# Altium PCB nir_usb.PcbDoc
Units mm, origin at the board's own origin, x right, y up, seen from the top; angles counter-clockwise.
Board outline 103 x 103.89 mm, 2 copper layers (Top Layer, Bottom Layer); 173 components, 118 nets, 611 pads, 0 vias.
Unrouted connection lines stored in the file: 446.
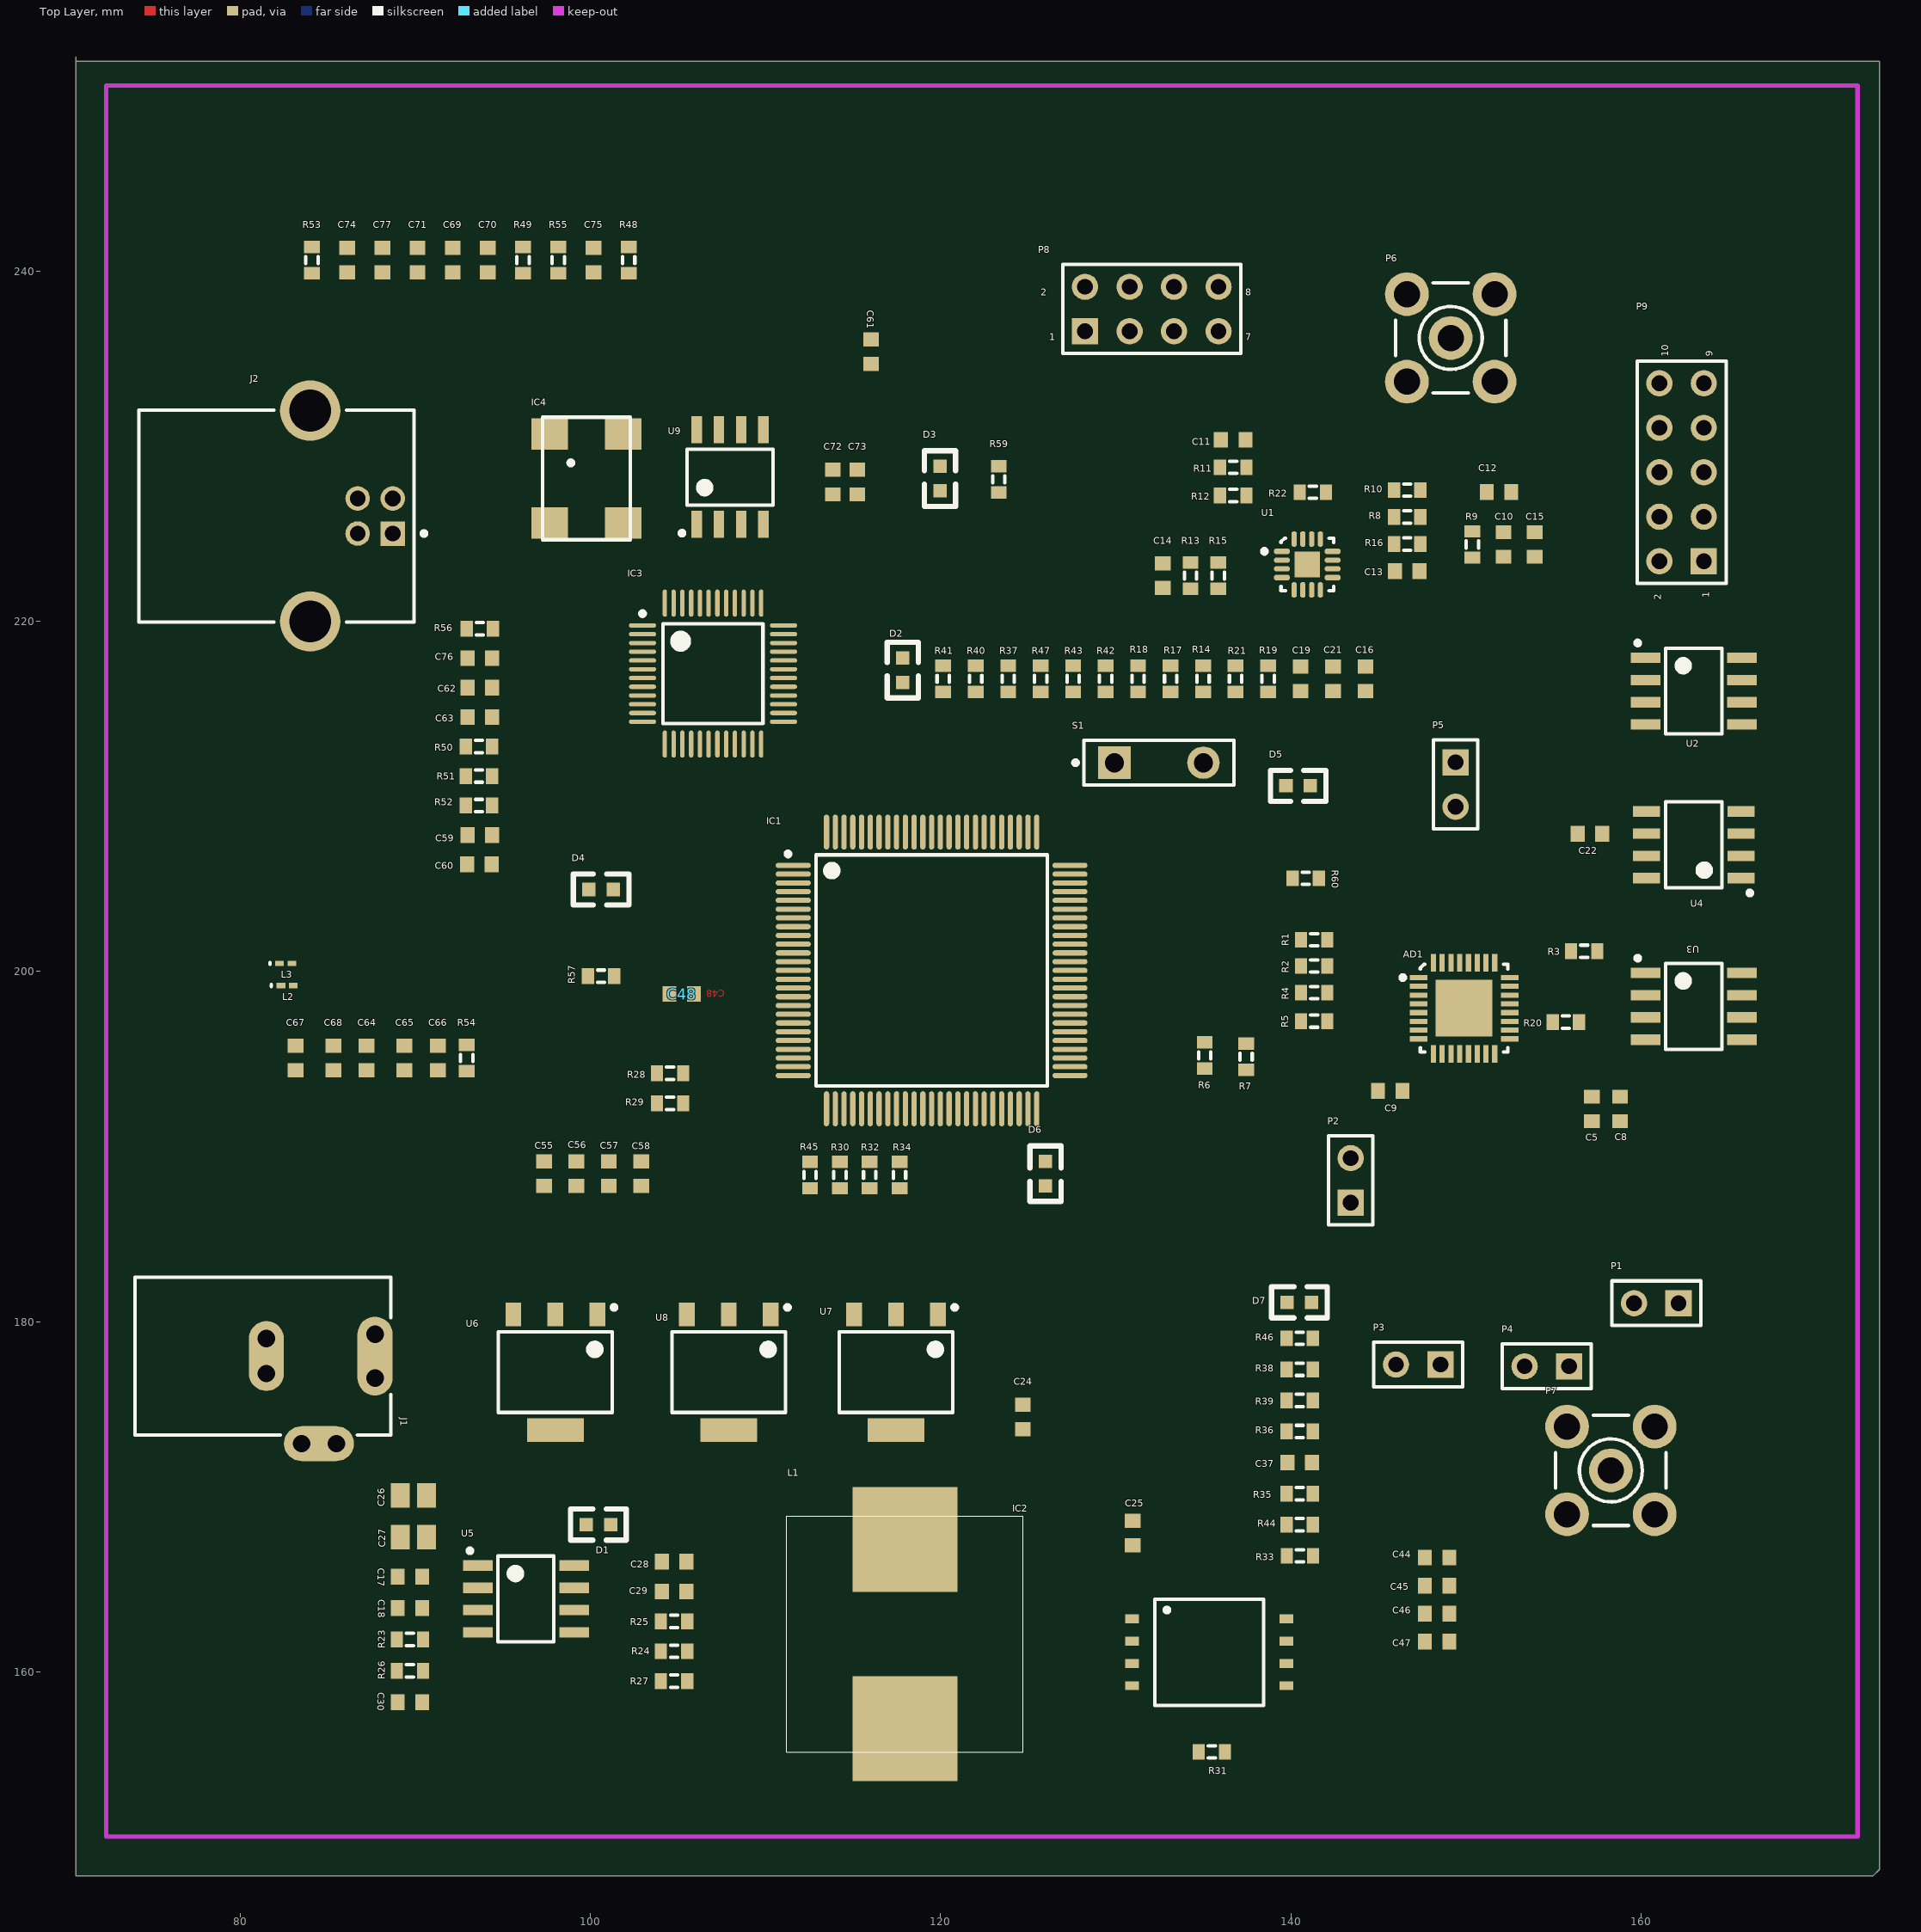
[diagram p0: Top Layer view]
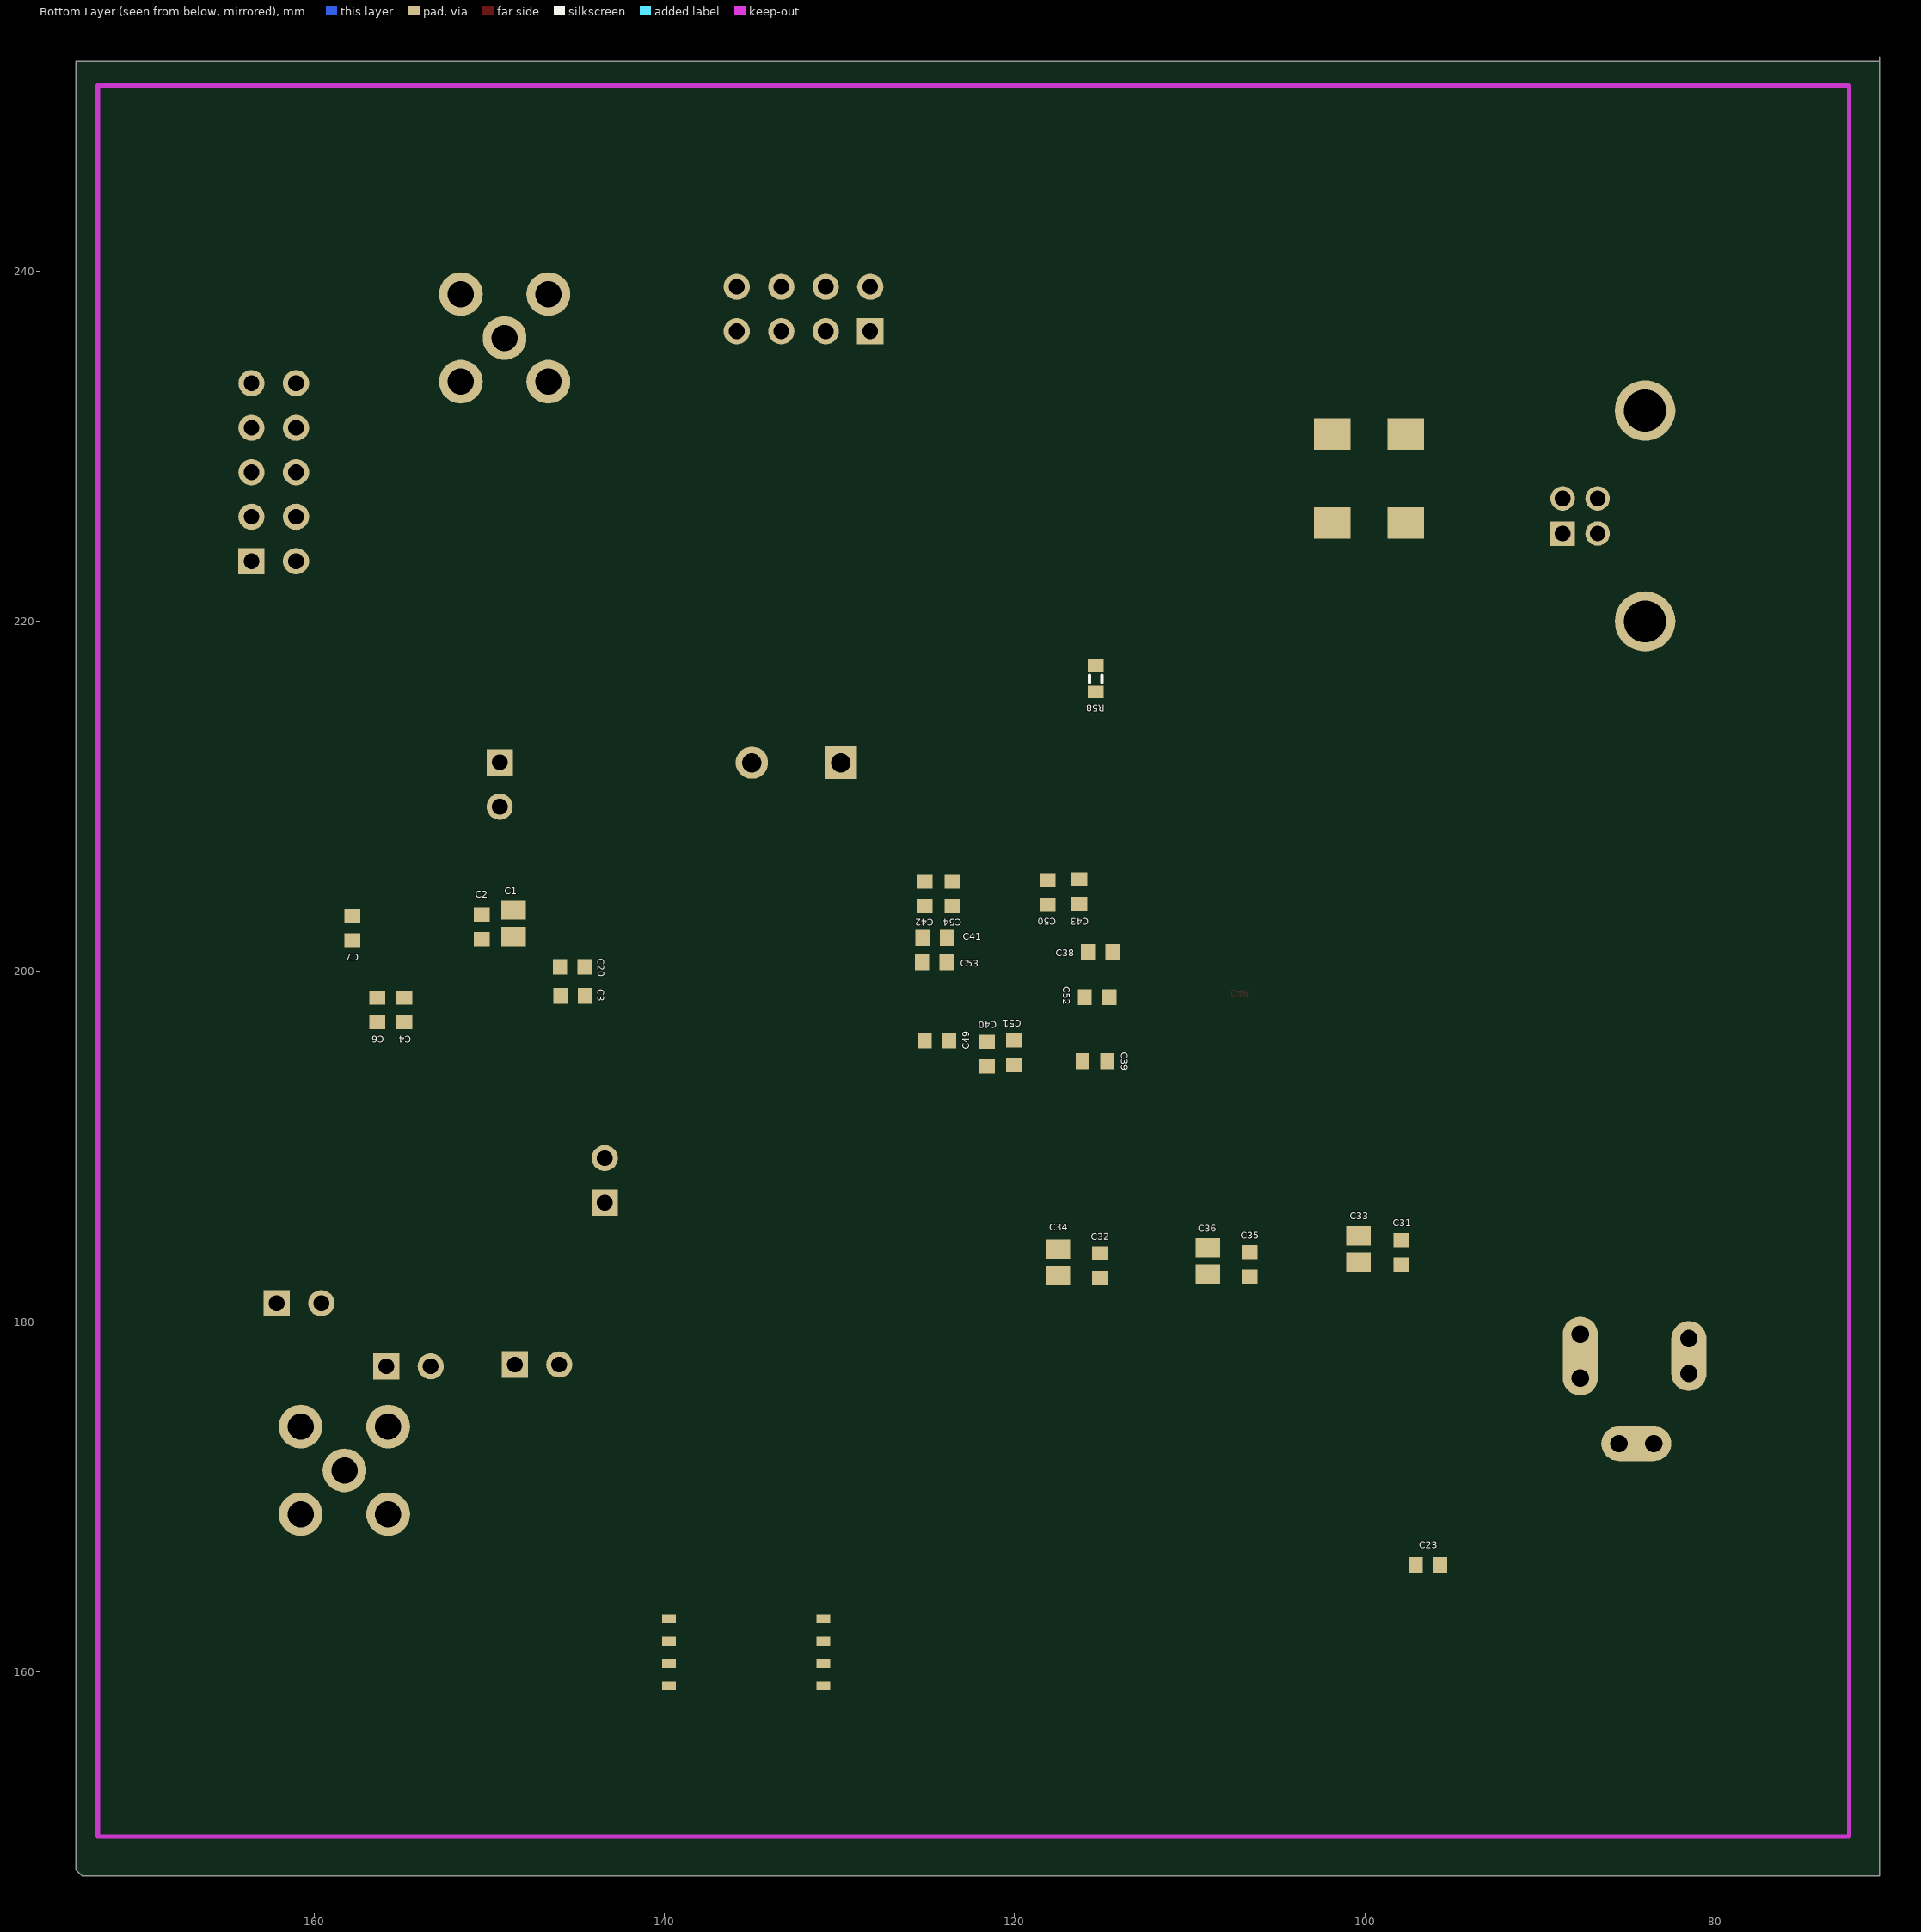
[diagram p1: Bottom Layer view, seen from below]

## Layer stack, top to bottom
Top Layer: signal copper 0.0356
Dielectric: dielectric 0.32, FR-4, Dk 4.8
Bottom Layer: signal copper 0.0356

## Board outline
70.612,251.968 173.609,251.968 173.609,148.717 173.228,148.336 70.612,148.336 70.612,252.222

## Design rules (kind name [scope] priority, off if disabled: settings)
Clearance [All] p1: gap=0.02
ComponentClearance [All] p1: gap=0.025 collisioncheckmode=3 verticalgap=0.025 showdistances=FALSE
PlaneClearance [All] p1: clearance=0.3
PolygonConnect [All] p1: connectstyle=Relief reliefconductorwidth=0.254 reliefentries=4 polygonreliefangle="90 Angle" airgapwidth=0.254
RoutingVias [All] p1: holewidth=0.711 width=1.27 viastyle="Through Hole" minholewidth=0.711 minwidth=1.27 maxholewidth=0.711 maxwidth=1.27
SolderMaskExpansion [All] p1: expansion=0.05
Width [All] p1: maxlimit=0.254 minlimit=0.254 preferedwidth=0.254
26 further rules are at their usual default settings.

## Classes and differential pairs
component class ft232h: C59 C60 C61 C62 C63 C64 C65 C66 C67 C68 C69 C70 C71 C72 C73 C74 C75 C76 C77 IC3 IC4 J2 L2 L3 R48 R49 R50 R51 R52 R53 R54 R55 R56 U9
component class fpga_pwr: C38 C39 C40 C41 C42 C43 C44 C45 C46 C47 C48 C49 C50 C51 C52 C53 C54 C55 C56 C57 C58
component class fpga_misc: C37 D6 D7 IC2 P8 R28 R29 R30 R31 R32 R33 R34 R35 R36 R37 R38 R39 R40 R41 R42 R43 R44 R45 R46 R47 S1
component class fpga_io: D2 D3 D4 D5 IC1 R57 R58 R59 R60
component class digi_pwr: C31 C32 C33 C34 C35 C36 U6 U7 U8
component class digi_5V: C23 C24 C25 C26 C27 C28 C29 C30 D1 J1 L1 R23 R24 R25 R26 R27 U5
component class analog_pwr: C17 C18 C19 C20 C21 C22 R19 R20 R21 R22 U2 U3 U4
component class adc: AD1 C1 C2 C3 C4 C5 C6 C7 C8 C9 P1 P2 P3 P4 R1 R2 R3 R4 R5 R6 R7
component class adc_buffer: C10 C11 C12 C13 C14 C15 C16 P5 P6 P7 R8 R9 R10 R11 R12 R13 R14 R15 R16 R17 R18 U1

## Components (designator, comment, footprint, x,y, rotation, side; value= is the part's Value field where it differs from the comment)
AD1 "AD7961" QFN50P500X500X80-33N 149.885,197.891 r0 top
C1 "Cap Pol3" C0805 148.615,202.743 r90 bottom
C2 "Cap Semi" 1608[0603] 150.419,202.543 r90 bottom
C3 "Cap Semi" 1608[0603] 145.237,198.603 r180 bottom
C4 "Cap Semi" 1608[0603] 154.838,197.79 r90 bottom
C5 "Cap Semi" 1608[0603] 157.175,192.14 r270 top
C6 "Cap Semi" 1608[0603] 156.388,197.79 r270 bottom
C7 "Cap Semi" 1608[0603] 157.81,202.475 r270 bottom
C8 "Cap Semi" 1608[0603] 158.792,192.14 r270 top
C9 "Cap Semi" 1608[0603] 145.669,193.167 r0 top
C10 "Cap Semi" 1608[0603] 152.133,224.376 r270 top
C11 "Cap Semi" 1608[0603] 136.703,230.353 r180 top
C12 "Cap Semi" 1608[0603] 151.879,227.373 r180 top
C13 "Cap Semi" 1608[0603] 146.634,222.86 r180 top
C14 "Cap Semi" 1608[0603] 132.677,222.598 r270 top
C15 "Cap Semi" 1608[0603] 153.911,224.376 r90 top
C16 "Cap Semi" 1608[0603] 144.259,216.705 r90 top
C17 "Cap Semi" 1608[0603] 89.691,165.43 r180 top
C18 "Cap Semi" 1608[0603] 89.691,163.64 r180 top
C19 "Cap Semi" 1608[0603] 140.549,216.705 r90 top
C20 "Cap Semi" 1608[0603] 145.263,200.254 r0 bottom
C21 "Cap Semi" 1608[0603] 142.404,216.705 r90 top
C22 "Cap Semi" 1608[0603] 157.074,207.86 r0 top
C23 "Cap Semi" 1608[0603] 96.393,166.091 r0 bottom
C24 "Cap Semi" 1608[0603] 124.689,174.549 r90 top
C25 "Cap Semi" 1608[0603] 130.962,167.919 r90 top
C26 "Cap Pol3" C0805 89.891,170.078 r0 top
C27 "Cap Pol3" C0805 89.891,167.691 r0 top
C28 "Cap Semi" 1608[0603] 104.775,166.294 r180 top
C29 "Cap Semi" 1608[0603] 104.775,164.586 r0 top
C30 "Cap Semi" 1608[0603] 89.691,158.267 r0 top
C31 "Cap Semi" 1608[0603] 97.917,183.95 r270 bottom
C32 "Cap Semi" 1608[0603] 115.138,183.188 r270 bottom
C33 "Cap Pol3" C0805 100.381,184.15 r90 bottom
C34 "Cap Pol3" C0805 117.526,183.388 r90 bottom
C35 "Cap Semi" 1608[0603] 106.578,183.264 r270 bottom
C36 "Cap Pol3" C0805 108.966,183.464 r90 bottom
C37 "Cap Semi" 1608[0603] 140.496,171.947 r0 top
C38 "Cap Semi" 1608[0603] 115.113,201.117 r180 bottom
C39 "Cap Semi" 1608[0603] 115.418,194.869 r180 bottom
C40 "Cap Semi" 1608[0603] 121.564,195.275 r270 bottom
C41 "Cap Semi" 1608[0603] 124.562,201.905 r0 bottom
C42 "Cap Semi" 1608[0603] 125.146,204.419 r90 bottom
C43 "Cap Semi" 1608[0603] 116.307,204.546 r90 bottom
C44 "Cap Semi" 1608[0603] 148.343,166.521 r0 top
C45 "Cap Semi" 1608[0603] 148.343,164.919 r0 top
C46 "Cap Semi" 1608[0603] 148.343,163.318 r0 top
C47 "Cap Semi" 1608[0603] 148.343,161.716 r0 top
C48 "Cap Semi" 1608[0603] 105.207,198.704 r180 top
C49 "Cap Semi" 1608[0603] 124.435,196.037 r0 bottom
C50 "Cap Semi" 1608[0603] 118.11,204.495 r90 bottom
C51 "Cap Semi" 1608[0603] 120.04,195.351 r270 bottom
C52 "Cap Semi" 1608[0603] 115.291,198.526 r180 bottom
C53 "Cap Semi" 1608[0603] 124.587,200.508 r0 bottom
C54 "Cap Semi" 1608[0603] 123.546,204.419 r90 bottom
C55 "Cap Semi" 1608[0603] 97.348,188.439 r90 top
C56 "Cap Semi" 1608[0603] 99.199,188.439 r90 top
C57 "Cap Semi" 1608[0603] 101.051,188.439 r90 top
C58 "Cap Semi" 1608[0603] 102.902,188.439 r90 top
C59 "Cap Semi" 1608[0603] 93.686,207.785 r0 top
C60 "Cap Semi" 1608[0603] 93.661,206.102 r0 top
C61 "Cap Semi" 1608[0603] 116.027,235.382 r270 top
C62 "Cap Semi" 1608[0603] 93.686,216.198 r0 top
C63 "Cap Semi" 1608[0603] 93.686,214.516 r0 top
C64 "Cap Semi" 1608[0603] 87.224,195.047 r90 top
C65 "Cap Semi" 1608[0603] 89.383,195.047 r90 top
C66 "Cap Semi" 1608[0603] 91.288,195.047 r90 top
C67 "Cap Semi" 1608[0603] 83.16,195.047 r90 top
C68 "Cap Semi" 1608[0603] 85.319,195.047 r90 top
C69 "Cap Semi" 1608[0603] 92.137,240.614 r90 top
C70 "Cap Semi" 1608[0603] 94.147,240.614 r90 top
C71 "Cap Semi" 1608[0603] 90.128,240.614 r90 top
C72 "Cap Semi" 1608[0603] 113.843,227.94 r270 top
C73 "Cap Semi" 1608[0603] 115.24,227.94 r270 top
C74 "Cap Semi" 1608[0603] 86.109,240.614 r90 top
C75 "Cap Semi" 1608[0603] 100.175,240.614 r90 top
C76 "Cap Semi" 1608[0603] 93.686,217.881 r0 top
C77 "Cap Semi" 1608[0603] 88.118,240.614 r90 top
D1 "B340A" LED0603 100.457,168.402 r180 top
D2 "Diode" LED0603 117.831,217.198 r270 top
D3 "Diode" LED0603 119.964,228.143 r270 top
D4 "Diode" LED0603 100.609,204.673 r0 top
D5 "Diode" LED0603 140.411,210.591 r0 top
D6 "LED3" LED0603 125.984,188.443 r90 top
D7 "LED3" LED0603 140.487,181.102 r180 top
IC1 "XC3S200A-VQ100" QFP50P1600X1600X120-100N 119.482,200.05 r0 top
IC2 "M25P80" SO8-WIDE8 135.331,161.112 r0 top
IC3 "FT232HL" LQFP-48_L 107,217 r0 top
IC4 "CO4305-12M" CO4305-12 99.771,228.143 r270 top
J1 "PWR2.5" KLD-0202 74,178.029 r0 top
J2 "Molex 67068" USB-A 84,226 r270 top
L1 "Inductor" "LC Inductor 127" 117.958,162.154 r90 top
L2 "Inductor" 0603 82.683,199.187 r0 top
L3 "Inductor" 0603 82.601,200.457 r0 top
P1 "Header 2" HDR1X2 162.128,181.051 r180 top
P2 "Header 2" HDR1X2 143.408,186.792 r90 top
P3 "Header 2" HDR1X2 148.539,177.546 r180 top
P4 "Header 2" HDR1X2 155.88,177.444 r180 top
P5 "Header 2" HDR1X2 149.403,211.938 r270 top
P6 "SMB" SMB_V-RJ45 149.123,236.169 r0 top
P7 "SMB" SMB_V-RJ45 158.267,171.501 r0 top
P8 "Header 4X2" HDR2X4 128.245,236.55 r0 top
P9 "Header 5X2" HDR2X5 163.576,223.418 r90 top
R1 "Res3" J1-0603 141.326,201.803 r0 top
R2 "Res3" J1-0603 141.326,200.304 r0 top
R3 "0R" J1-0603 156.743,201.143 r180 top
R4 "Res3" J1-0603 141.326,198.78 r0 top
R5 "Res3" J1-0603 141.326,197.155 r0 top
R6 "Res3" J1-0603 135.077,195.199 r270 top
R7 "Res3" J1-0603 137.439,195.123 r90 top
R8 "Res3" J1-0603 146.634,225.941 r0 top
R9 "Res3" J1-0603 150.355,224.376 r90 top
R10 "Res3" J1-0603 146.634,227.482 r180 top
R11 "Res3" J1-0603 136.703,228.778 r180 top
R12 "Res3" J1-0603 136.703,227.178 r180 top
R13 "Res3" J1-0603 134.264,222.598 r90 top
R14 "Res3" J1-0603 134.983,216.705 r90 top
R15 "Res3" J1-0603 135.852,222.598 r270 top
R16 "Res3" J1-0603 146.634,224.401 r0 top
R17 "Res3" J1-0603 133.128,216.705 r90 top
R18 "Res3" J1-0603 131.273,216.705 r90 top
R19 "Res3" J1-0603 138.694,216.705 r270 top
R20 "Res3" J1-0603 155.702,197.104 r0 top
R21 "Res3" J1-0603 136.839,216.705 r90 top
R22 "Res3" J1-0603 141.249,227.355 r180 top
R23 "Res3" J1-0603 89.691,161.849 r180 top
R24 "Res3" J1-0603 104.775,161.169 r0 top
R25 "Res3" J1-0603 104.775,162.877 r180 top
R26 "Res3" J1-0603 89.691,160.058 r0 top
R27 "Res3" J1-0603 104.775,159.461 r180 top
R28 "Res3" J1-0603 104.546,194.177 r180 top
R29 "Res3" J1-0603 104.546,192.456 r180 top
R30 "Res3" J1-0603 114.241,188.366 r90 top
R31 "Res3" J1-0603 135.484,155.423 r0 top
R32 "Res3" J1-0603 115.947,188.366 r90 top
R33 "Res3" J1-0603 140.513,166.624 r180 top
R34 "Res3" J1-0603 117.653,188.366 r270 top
R35 "Res3" J1-0603 140.496,170.173 r0 top
R36 "Res3" J1-0603 140.496,173.721 r180 top
R37 "Res3" J1-0603 123.852,216.705 r90 top
R38 "Res3" J1-0603 140.496,177.27 r0 top
R39 "Res3" J1-0603 140.496,175.495 r0 top
R40 "Res3" J1-0603 121.997,216.705 r270 top
R41 "Res3" J1-0603 120.142,216.705 r270 top
R42 "Res3" J1-0603 129.418,216.705 r270 top
R43 "Res3" J1-0603 127.563,216.705 r270 top
R44 "Res3" J1-0603 140.496,168.398 r0 top
R45 "Res3" J1-0603 112.535,188.366 r90 top
R46 "Res3" J1-0603 140.496,179.044 r180 top
R47 "Res3" J1-0603 125.708,216.705 r270 top
R48 "Res3" J1-0603 102.184,240.614 r90 top
R49 "Res3" J1-0603 96.156,240.614 r90 top
R50 "Res3" J1-0603 93.636,212.833 r180 top
R51 "Res3" J1-0603 93.636,211.15 r180 top
R52 "Res3" J1-0603 93.636,209.467 r180 top
R53 "Res3" J1-0603 84.099,240.614 r270 top
R54 "Res3" J1-0603 92.939,195.047 r90 top
R55 "Res3" J1-0603 98.165,240.614 r90 top
R56 "Res3" J1-0603 93.686,219.564 r180 top
R57 "Res3" J1-0603 100.609,199.72 r180 top
R58 "Res3" J1-0603 115.367,216.705 r270 bottom
R59 "Res3" J1-0603 123.317,228.092 r270 top
R60 "Res3" J1-0603 140.843,205.308 r0 top
S1 "SW-PB" SPST-2 132.461,211.912 r0 top
U1 "ADA9432-1" QFN50P300X300X100VQ-17N 140.932,223.233 r0 top
U2 "MIC5209BM" SOIC127P600X175-8N#1 163,216 r0 top
U3 "MIC5209BM" SOIC127P600X175-8N#1 163,198 r0 top
U4 "REF5040" SOIC127P600X175-8N#2 163,207.225 r180 top
U5 "TPS54331" SOIC127P600X175-8N#1 96.317,164.16 r0 top
U6 "AMS1117" SOT-223 98,177.114 r270 top
U7 "AMS1117" SOT-223 117.45,177.114 r270 top
U8 "AMS1117" SOT-223 107.899,177.114 r270 top
U9 "93C46" SOIC127P600X175-8N#2 107.975,228.219 r90 top

## Footprints (in the part's own frame and the unit in brackets; to place one, negate y for a bottom-side part, rotate by r counter-clockwise, add the part's x,y. Pads: shape width x height; smd on the part's side, far side on the other; paste and mask are expansions set on the pad)
0603 [mm] "Chip Inductor, Body 0.6x0.3mm, IPC High Density"
  rect 0.5x0.3 smd: 1(-0.35,0) 2(0.35,0)
  silkscreen extent -0.9,-0.05 -0.9,0.05, body extent -0.33,-0.18 0.33,0.18, height 0.55
1608[0603] [mm] "Chip Capacitor, Body 1.6x0.8mm, IPC High Density"
  rect 0.8x0.9 smd: 1(-0.7,0) 2(0.7,0)
  body extent -0.87,-0.48 0.87,0.48, height 1.3
C0805 [mm] "Chip Capacitor, Body 2.0x1.3mm, IPC High Density"
  rect 1.1x1.4 smd: 1(-0.75,0) 2(0.75,0)
  body extent -1.1,-0.72 1.1,0.72, height 1.4
CO4305-12 [mm]
  rect 1.8x2.1 all layers, no hole: 1(-2.54,-2.1) 2(2.54,-2.1) 3(2.54,2.1) 4(-2.54,2.1)
  silkscreen extent -3.5,-2.5 3.5,2.5
HDR1X2 [mm] "Connector; Header; 2 Position"
  rect 1.5x1.5 hole 0.9: 1(0,0)
  round 1.5 hole 0.9: 2(2.54,0)
  silkscreen extent -1.27,-1.27 3.81,1.27
HDR2X4 [mm] "Connector; Header; 4x2 Position"
  rect 1.5x1.5 hole 0.9: 1(0,0)
  round 1.5 hole 0.9: 2(0,2.54) 3(2.54,0) 4(2.54,2.54) 5(5.08,0) 6(5.08,2.54) 7(7.62,0) 8(7.62,2.54)
  silkscreen extent -1.27,-1.27 8.89,3.81
HDR2X5 [mm] "Connector; Header; 5x2 Position"
  rect 1.5x1.5 hole 0.9: 1(0,0)
  round 1.5 hole 0.9: 2(0,2.54) 3(2.54,0) 4(2.54,2.54) 5(5.08,0) 6(5.08,2.54) 7(7.62,0) 8(7.62,2.54) 9(10.16,0) 10(10.16,2.54)
  silkscreen extent -1.27,-1.27 11.43,3.81
J1-0603 [mm] "Chip Resistor, Body 1.6x0.8mm, IPC High Density"
  rect 0.7x0.9 smd: 1(-0.75,0) 2(0.75,0)
  silkscreen extent -0.2,-0.35 0.2,0.35, body extent -0.85,-0.48 0.85,0.48, height 0.9
KLD-0202 [mm] "DC Power Jack, 2.5mm, KLD Series, PCB Mount"
  oval 2x4.5 all layers, no hole: 1(13.7,0)
  round 1.5 hole 1: 1A(13.7,-1.25) 1B(13.7,1.25) 2A(7.5,-1) 2B(7.5,1) 3A(9.5,-5) 3B(11.5,-5)
  oval 2x4 all layers, no hole: 2(7.5,0)
  oval 4x2 all layers, no hole: 3(10.5,-5)
  silkscreen extent 0,-4.5 14.6,4.5
"LC Inductor 127" [mm]
  rect 6x6 smd: 1(-5.4,0) 2(5.4,0)
  silkscreen extent -6.75,-6.75 6.75,6.75
LED0603 [mil]
  rect 30x30 smd: 1(-27.4,0) 2(27.6,0)
  silkscreen extent -62,-35 63,35
LQFP-48_L [mm] "48-Pin Thin Quad Flat Pack 0.5 mm Pitch, IPC High Density"
  oval 1.55x0.25 smd: 1(-4.025,2.75) 2(-4.025,2.25) 3(-4.025,1.75) 4(-4.025,1.25) 5(-4.025,0.75) 6(-4.025,0.25) 7(-4.025,-0.25) 8(-4.025,-0.75) 9(-4.025,-1.25) 10(-4.025,-1.75) 11(-4.025,-2.25) 12(-4.025,-2.75) 25(4.025,-2.75) 26(4.025,-2.25) 27(4.025,-1.75) 28(4.025,-1.25) 29(4.025,-0.75) 30(4.025,-0.25) 31(4.025,0.25) 32(4.025,0.75) 33(4.025,1.25) 34(4.025,1.75) 35(4.025,2.25) 36(4.025,2.75)
  oval 0.25x1.55 smd: 13(-2.75,-4.025) 14(-2.25,-4.025) 15(-1.75,-4.025) 16(-1.25,-4.025) 17(-0.75,-4.025) 18(-0.25,-4.025) 19(0.25,-4.025) 20(0.75,-4.025) 21(1.25,-4.025) 22(1.75,-4.025) 23(2.25,-4.025) 24(2.75,-4.025) 37(2.75,4.025) 38(2.25,4.025) 39(1.75,4.025) 40(1.25,4.025) 41(0.75,4.025) 42(0.25,4.025) 43(-0.25,4.025) 44(-0.75,4.025) 45(-1.25,4.025) 46(-1.75,4.025) 47(-2.25,4.025) 48(-2.75,4.025)
  silkscreen extent -4.15,-2.85 2.85,3.55, body extent -3.5,-3.5 3.5,3.5, height 1.6
QFN50P300X300X100VQ-17N [mm]
  oct 0.9x0.3 smd mask+0.05: 1(-1.45,0.75) 2(-1.45,0.25) 3(-1.45,-0.25) 4(-1.45,-0.75) 9(1.45,-0.75) 10(1.45,-0.25) 11(1.45,0.25)
  oct 0.3x0.9 smd mask+0.05: 5(-0.75,-1.45) 6(-0.25,-1.45) 7(0.25,-1.45) 8(0.75,-1.45) 13(0.75,1.45) 14(0.25,1.45) 15(-0.25,1.45) 16(-0.75,1.45)
  oct 0.9x0.3 smd paste+0 mask+0.05: 12(1.45,0.75)
  rect 1.45x1.45 smd: 17(0,0)
  silkscreen extent -2.57,-1.5 1.5,1.5
QFN50P500X500X80-33N [mm]
  rect 1x0.3 smd mask+0.05: 1(-2.6,1.75) 2(-2.6,1.25) 3(-2.6,0.75) 4(-2.6,0.25) 5(-2.6,-0.25) 6(-2.6,-0.75) 7(-2.6,-1.25) 8(-2.6,-1.75) 17(2.6,-1.75) 18(2.6,-1.25) 19(2.6,-0.75) 20(2.6,-0.25) 21(2.6,0.25) 22(2.6,0.75) 23(2.6,1.25) 24(2.6,1.75)
  rect 0.3x1 smd mask+0.05: 9(-1.75,-2.6) 10(-1.25,-2.6) 11(-0.75,-2.6) 12(-0.25,-2.6) 13(0.25,-2.6) 14(0.75,-2.6) 15(1.25,-2.6) 16(1.75,-2.6) 25(1.75,2.6) 26(1.25,2.6) 27(0.75,2.6) 28(0.25,2.6) 29(-0.25,2.6) 30(-0.75,2.6) 31(-1.25,2.6) 32(-1.75,2.6)
  rect 3.25x3.25 smd mask+0.05: 33(0,0)
  silkscreen extent -3.62,-2.5 2.5,2.5
QFP50P1600X1600X120-100N [mm]
  oval 2x0.3 smd: 1(-7.9,6) 2(-7.9,5.5) 3(-7.9,5) 4(-7.9,4.5) 5(-7.9,4) 6(-7.9,3.5) 7(-7.9,3) 8(-7.9,2.5) 9(-7.9,2) 10(-7.9,1.5) 11(-7.9,1) 12(-7.9,0.5) 13(-7.9,0) 14(-7.9,-0.5) 15(-7.9,-1) 16(-7.9,-1.5) 17(-7.9,-2) 18(-7.9,-2.5) 19(-7.9,-3) 20(-7.9,-3.5) 21(-7.9,-4) 22(-7.9,-4.5) 23(-7.9,-5) 24(-7.9,-5.5) 25(-7.9,-6) 51(7.9,-6) 52(7.9,-5.5) 53(7.9,-5) 54(7.9,-4.5) 55(7.9,-4) 56(7.9,-3.5) 57(7.9,-3) 58(7.9,-2.5) 59(7.9,-2) 60(7.9,-1.5) 61(7.9,-1) 62(7.9,-0.5) 63(7.9,0) 64(7.9,0.5) 65(7.9,1) 66(7.9,1.5) 67(7.9,2) 68(7.9,2.5) 69(7.9,3) 70(7.9,3.5) 71(7.9,4) 72(7.9,4.5) 73(7.9,5) 74(7.9,5.5) 75(7.9,6)
  oval 0.3x2 smd: 26(-6,-7.9) 27(-5.5,-7.9) 28(-5,-7.9) 29(-4.5,-7.9) 30(-4,-7.9) 31(-3.5,-7.9) 32(-3,-7.9) 33(-2.5,-7.9) 34(-2,-7.9) 35(-1.5,-7.9) 36(-1,-7.9) 37(-0.5,-7.9) 38(0,-7.9) 39(0.5,-7.9) 40(1,-7.9) 41(1.5,-7.9) 42(2,-7.9) 43(2.5,-7.9) 44(3,-7.9) 45(3.5,-7.9) 46(4,-7.9) 47(4.5,-7.9) 48(5,-7.9) 49(5.5,-7.9) 50(6,-7.9) 76(6,7.9) 77(5.5,7.9) 78(5,7.9) 79(4.5,7.9) 80(4,7.9) 81(3.5,7.9) 82(3,7.9) 83(2.5,7.9) 84(2,7.9) 85(1.5,7.9) 86(1,7.9) 87(0.5,7.9) 88(0,7.9) 89(-0.5,7.9) 90(-1,7.9) 91(-1.5,7.9) 92(-2,7.9) 93(-2.5,7.9) 94(-3,7.9) 95(-3.5,7.9) 96(-4,7.9) 97(-4.5,7.9) 98(-5,7.9) 99(-5.5,7.9) 100(-6,7.9)
  silkscreen extent -8.32,-6.6 6.6,6.77
SMB_V-RJ45 [mm] "Connector; SMB Straight"
  round 2.5 hole 1.5: 1(0,0) 2(-2.5,-2.5) 2(-2.5,2.5) 2(2.5,-2.5) 2(2.5,2.5)
  silkscreen extent -3.15,-3.15 3.15,3.15
SO8-WIDE8 [mm]
  rect 0.8x0.51 all layers, no hole: 1(-4.405,1.905) 2(-4.405,0.635) 3(-4.405,-0.635) 4(-4.405,-1.905) 5(4.405,-1.905) 6(4.405,-0.635) 7(4.405,0.635) 8(4.405,1.905)
  silkscreen extent -3.11,-3.02 3.11,3.02
SOIC127P600X175-8N#1 [mm]
  rect 1.7x0.6 smd: 1(-2.75,1.905) 2(-2.75,0.635) 3(-2.75,-0.635) 4(-2.75,-1.905) 5(2.75,-1.905) 6(2.75,-0.635) 7(2.75,0.635) 8(2.75,1.905)
  silkscreen extent -3.32,-2.45 1.6,2.87
SOIC127P600X175-8N#2 [mm]
  rect 1.55x0.6 smd: 1(-2.7,1.905) 2(-2.7,0.635) 3(-2.7,-0.635) 4(-2.7,-1.905) 5(2.7,-1.905) 6(2.7,-0.635) 7(2.7,0.635) 8(2.7,1.905)
  silkscreen extent -3.33,-2.45 1.6,2.87
SOT-223 [mm]
  rect 1.35x0.9 smd: 1(-3.295,2.4) 2(-3.295,0) 3(-3.295,-2.4)
  rect 1.35x3.25 smd: 4(3.305,0)
  silkscreen extent -3.82,-3.25 2.3,3.48
SPST-2 [mm] "Switch; 2 Leads"
  rect 1.85x1.85 hole 1.1: 1(-2.54,0)
  round 1.85 hole 1.1: 2(2.54,0)
  silkscreen extent -4.89,-1.27 4.28,1.27
USB-A [mm]
  rect 1.4x1.4 / inner round 1.4 / far side rect 1.4x1.4 hole 0.9: 1(1,4.71)
  round 1.4 hole 0.9: 2(-1,4.71) 3(-1,2.71) 4(1,2.71)
  round 3.45 hole 2.4: 5(-6.02,0) 6(6.02,0)
  silkscreen extent -6.05,-9.78 6.05,6.62

## Part data
C1 C26 C27 C33 C34 C36: "Polarized Capacitor (Surface Mount)"
C2 C3 C4 C5 C6 C7 C8 C9 C10 C11 C12 C13 C14 C15 C16 C17 C18 C19 C20 C21 C22 C23 C24 C25 C28 C29 C30 C31 C32 C35 C37 C38 C39 C40 C41 C42 C43 C44 C45 C46 C47 C48 C49 C50 C51 C52 C53 C54 C55 C56 C57 C58 C59 C60 C61 C62 C63 C64 C65 C66 C67 C68 C69 C70 C71 C72 C73 C74 C75 C76 C77: "Capacitor (Semiconductor SIM Model)"
D1: library part "D Schottky", "Schottky Diode"
D2 D3 D4 D5: "Default Diode"
D6 D7: "Typical BLUE SiC LED"
J1: "Low Voltage Power Supply Connector"
P1 P2 P3 P4 P5: "Header, 2-Pin"
P6 P7: "SMB Straight Connector"
P8: "Header, 4-Pin, Dual row"
P9: "Header, 5-Pin, Dual row"
R1 R2 R4 R5 R6 R7 R8 R9 R10 R11 R12 R13 R14 R15 R16 R17 R18 R19 R20 R21 R22 R23 R24 R25 R26 R27 R28 R29 R30 R31 R32 R33 R34 R35 R36 R37 R38 R39 R40 R41 R42 R43 R44 R45 R46 R47 R48 R49 R50 R51 R52 R53 R54 R55 R56 R57 R58 R59 R60: "Resistor"
R3: library part Res3, "Resistor"
S1: "Switch"

## Nets (pads, with @x,y where several pads share a name; then routed paths per layer and width w, separated by ;. In a path a pad name is that pad's centre, name@x,y a point inside that pad or via, vN(x,y) a via of type N, cw(c..) or ccw(c..) an arc to the next point about the centre after c; other vN are vias at no path point)
AD_TRI: P9.10
ADC_IN+: AD1.23 C12.1 C15.2 R16.2
ADC_IN-: AD1.22 C10.1 C12.2 R9.2
CCLK: IC1.53 R39.1
CLK+: AD1.17 IC1.56 P1.1 R6.2
CLK-: AD1.16 IC1.57 P1.2 R6.1
CLK_S: P9.9
CLKOUT: IC1.90 IC3.29
CONV+: AD1.9 IC1.64 P2.1 R7.1
CONV-: AD1.8 IC1.65 P2.2 R7.2
CSO_B: IC1.27 R34.1
D0: D4.2 IC1.20 IC3.13
D1: IC1.19 IC3.14
D2: IC1.16 IC3.15
D3: IC1.15 IC3.16
D4: IC1.13 IC3.17
D5: IC1.12 IC3.18
D6: IC1.10 IC3.19
D7: IC1.9 IC3.20
D+: AD1.11 IC1.61 P3.1
D-: AD1.10 IC1.62 P3.2
DCO+: AD1.15 IC1.59 P4.1
DCO-: AD1.14 IC1.60 P4.2
DIFF_IN+: P5.1 P6.1 P9.1 R10.1
DIFF_IN-: P5.2 P7.1 P9.2 R14.1
DONE: IC1.54 R38.1 R46.2
EECLK: IC3.44 R55.1 U9.2
EECS: IC3.45 R54.1 U9.1
EEDATA: IC3.43 R48.2 U9.3
EN0: IC1.73 R1.1 R60.1
EN1: IC1.72 R2.1
EN2: IC1.71 R4.1
EN3: IC1.70 R5.1
FT_RET: IC1.98 IC3.34
GND: AD1.13 AD1.24 AD1.26 AD1.27 AD1.28 C1.2 C2.2 C3.2 C4.2 C5.2 C6.1 C7.1 C8.2 C9.1 C10.2 C11.2 C13.1 C15.1 C16.1 C17.2 C18.2 C19.1 C20.1 C21.1 C22.1 C24.1 C25.1 C26.2 C27.2 C28.1 C30.1 C31.1 C32.1 C33.2 C34.2 C35.1 C36.2 C37.2 C38.1 C39.1 C40.1 C41.1 C42.1 C43.1 C44.1 C45.1 C46.1 C47.1 C48.1 C49.1 C50.1 C51.1 C52.1 C53.1 C54.1 C55.1 C56.1 C57.1 C58.1 C59.1 C60.1 C61.1 C62.1 C63.1 C64.1 C65.1 C66.1 C67.1 C68.1 C69.1 C70.1 C71.1 C72.1 C73.1 C74.1 C75.1 C76.1 C77.1 D1.1 D2.2 D5.2 D7.2 IC1.8 IC1.14 IC1.18 IC1.42 IC1.47 IC1.58 IC1.63 IC1.69 IC1.74 IC1.80 IC1.87 IC1.91 IC1.95 IC2.4 IC3.4 IC3.9 IC3.10 IC3.11 IC3.22 IC3.23 IC3.35 IC3.36 IC3.41 IC3.42 IC3.47 IC3.48 IC4.2 J1.2 J1.2A J1.2B J2.4 P6.2 P7.2 P8.1 P8.4 P8.7 P9.3 P9.4 P9.5 P9.8 R3.1 R8.2 R17.1 R18.1 R21.2 R22.2 R25.1 R26.1 R27.1 R28.2 R29.2 R47.1 R51.2 R53.2 S1.2 U1.13 U1.14 U1.15 U1.16 U2.5 U2.6 U2.7 U2.8 U3.5 U3.6 U3.7 U3.8 U4.4 U5.7 U6.1 U7.1 U8.1 U9.5
INIT_B: D6.2 IC1.48
M0: IC1.25 R30.1
M1: IC1.23 R28.1
M2: IC1.24 R29.1
MISO: IC1.51 R44.1
MOSI: IC1.46 R35.1
NetAD1_4: AD1.4 R1.2
NetAD1_5: AD1.5 R2.2
NetAD1_6: AD1.6 R4.2
NetAD1_7: AD1.7 R5.2
NetC11_1: C11.1 R8.1 R10.2 R11.1
NetC14_1: C14.1 R18.2
NetC14_2: C14.2 R13.1 R14.2 R17.2
NetC23_1: C23.1 U5.1
NetC23_2: C23.2 D1.2 L1.1 U5.8
NetC28_2: C28.2 C29.1 U5.6
NetC29_2: C29.2 R25.2
NetC30_2: C30.2 U5.4
NetC59_2: C59.2 C60.2 IC3.8 L2.2
NetC62_2: C62.2 C63.2 IC3.3 L3.2
NetC72_2: C72.2 IC3.38
NetC73_2: C73.2 IC3.37
NetC74_2: C74.2 J2.5 J2.6 R53.1
NetC76_2: C76.2 IC3.1 R56.1
NetD2_1: D2.1 R58.2
NetD3_1: D3.1 R59.1
NetD4_1: D4.1 R57.2
NetD5_1: D5.1 R60.2
NetD6_1: D6.1 R45.1
NetD7_1: D7.1 R46.1
NetIC1_1: IC1.1 R40.2
NetIC1_2: IC1.2 R41.2
NetIC1_75: IC1.75 R42.2
NetIC1_76: IC1.76 R43.2
NetIC1_99: IC1.99 R47.2
NetIC2_1: IC2.1 R32.1 R34.2
NetIC2_2: IC2.2 R44.2
NetIC2_3: IC2.3 R31.1
NetIC2_5: IC2.5 R35.2
NetIC2_6: IC2.6 R36.1 R39.2
NetIC2_7: IC2.7 R33.1
NetIC3_5: IC3.5 R51.1
NetIC3_6: IC3.6 R50.1
NetIC3_7: IC3.7 R52.1
NetIC4_3: IC4.3 R56.2
NetJ1_3: J1.3 J1.3A J1.3B
NetJ2_2: J2.2 R50.2
NetJ2_3: J2.3 R52.2
NetR9_1: R9.1 U1.11
NetR11_2: R11.2 R12.2 U1.2
NetR12_1: R12.1 U1.1
NetR13_2: R13.2 R15.1 U1.3
NetR15_2: R15.2 U1.4
NetR16_1: R16.1 U1.10
NetR19_2: R19.2 R21.1 U2.4
NetR20_2: R20.2 R22.1 U3.4
NetR23_1: R23.1 R26.2 U5.3
NetR24_1: R24.1 R27.2 U5.5
NetR48_1: R48.1 R49.1 U9.4
OE: IC1.31 IC3.30
PROG_B: IC1.100 R37.1 S1.1
PWRSAV#: IC1.94 IC3.31 R58.1
RD#: IC1.4 IC3.26
REFIN: AD1.3 R3.2
RET_S: P9.7
RXF#: IC1.6 IC3.21
SIWU#: D3.2 IC1.29 IC3.28
TCK: P8.5 R43.1
TDI: P8.8 R41.1
TDO: P8.6 R42.1
TMS: P8.3 R40.1
TXE#: IC1.5 IC3.25
VCC1V2: C36.1 C51.2 C52.2 C53.2 C54.2 C55.2 C56.2 C57.2 C58.2 IC1.17 IC1.38 IC1.66 IC1.81 U8.2 U8.4
VCC1V8: AD1.2 AD1.18 AD1.25 C3.1 C5.1 C8.1 C34.1 U7.2 U7.4
VCC3V3: C33.1 C37.1 C38.2 C39.2 C40.2 C41.2 C42.2 C43.2 C44.2 C45.2 C46.2 C47.2 C48.2 C49.2 C50.2 C64.2 C65.2 C66.2 C67.2 C68.2 C69.2 C70.2 C71.2 C75.2 C77.2 IC1.11 IC1.22 IC1.26 IC1.45 IC1.55 IC1.67 IC1.79 IC1.92 IC1.96 IC2.8 IC3.12 IC3.24 IC3.39 IC3.40 IC3.46 IC4.1 IC4.4 L2.1 L3.1 R30.2 R31.2 R32.2 R33.2 R36.2 R37.2 R38.2 R45.2 R49.2 R54.2 R55.2 R57.1 R59.2 U6.2 U6.4
VCC5: C24.2 C25.2 C31.2 C32.2 C35.2 C61.2 J2.1 L1.2 R24.2 U6.3 U7.3 U8.3 U9.6 U9.8
VCC5A: AD1.1 AD1.19 AD1.20 C4.1 C6.2 C7.2 C20.2 R20.1 U3.3
VCC7A: C16.2 C19.2 C21.2 R19.1 U1.5 U1.6 U1.7 U1.8 U1.12 U2.3 U3.1 U3.2 U4.2
VCC12: C17.1 C18.1 C26.1 C27.1 J1.1 J1.1A J1.1B P8.2 R23.2 U2.1 U2.2 U5.2
VCM: AD1.21 C13.2 U1.9
VIO: AD1.12 C9.2
VREF4V: AD1.29 AD1.30 AD1.31 AD1.32 C1.1 C2.1 C22.2 P9.6 U4.6
WR#: IC1.3 IC3.27
pads on no net: AD1.33 IC1.7 IC1.21 IC1.28 IC1.30 IC1.32 IC1.33 IC1.34 IC1.35 IC1.36 IC1.37 IC1.39 IC1.40 IC1.41 IC1.43 IC1.44 IC1.49 IC1.50 IC1.52 IC1.68 IC1.77 IC1.78 IC1.82 IC1.83 IC1.84 IC1.85 IC1.86 IC1.88 IC1.89 IC1.93 IC1.97 IC3.2 IC3.32 IC3.33 U1.17 U4.1 U4.3 U4.5 U4.7 U4.8 U9.7

## Keep-outs
Keep-Out Layer:
  lines w0.254: 72.352,150.584 72.352,250.584 172.352,250.584 172.352,150.584 72.352,150.584

## Text inside footprints (layer, text, board x,y; h text height)
AD1: Mechanical 15 "1" at 150.335,197.727 h0.75 r90
IC1: Mechanical 15 "1" at 119.932,199.886 h0.75 r90
J2: Mechanical 15 "1" at 88.546,224.55 h0.75
P8: Top Overlay "2" at 125.705,238.582 h0.4; Top Overlay "1" at 126.213,236.042 h0.4; Top Overlay "7" at 137.389,236.042 h0.4; Top Overlay "8" at 137.389,238.582 h0.4
P9: Top Overlay "10" at 161.544,235.102 h0.4 r90; Top Overlay "9" at 164.084,235.102 h0.4 r90; Top Overlay "1" at 163.881,221.336 h0.4 r90; Top Overlay "2" at 161.138,221.209 h0.4 r90
U1: Mechanical 15 "1" at 141.382,223.069 h0.4 r90
U2: Mechanical 15 "1" at 163.45,215.836 h0.75 r90
U3: Mechanical 15 "1" at 163.45,197.836 h0.75 r90
U4: Mechanical 15 "1" at 162.55,207.389 h0.75 r270
U5: Mechanical 15 "1" at 96.767,163.996 h0.75 r90
U6: Mechanical 15 "1" at 97.836,176.659 h0.75
U7: Mechanical 15 "1" at 117.285,176.659 h0.75
U8: Mechanical 15 "1" at 107.735,176.659 h0.75
U9: Mechanical 15 "1" at 108.14,228.669 h0.4 r180